# EAGLE board End_Spacer_B (EAGLE 9.5.2)
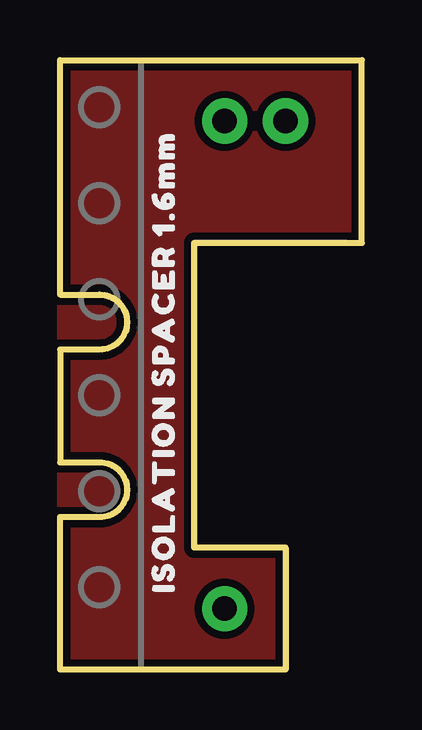
[diagram p0: board, top side]
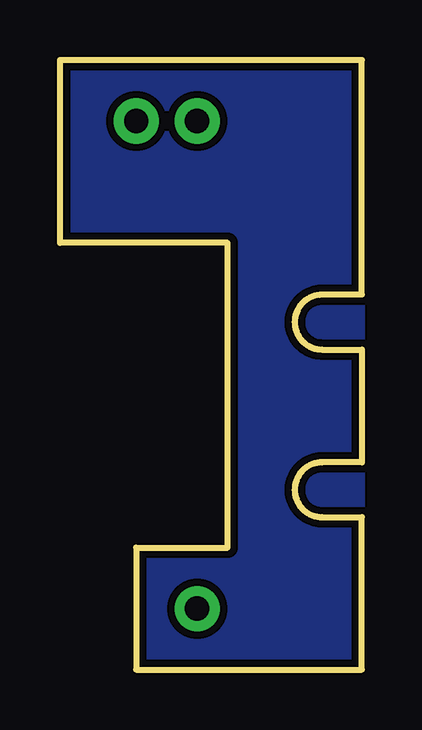
[diagram p1: board, bottom side, seen from below]

Size 12.57 x 25.4 mm. Coordinates in mm from the lower left corner, seen from the top.
Outline: 0,25.4 12.57,25.4 12.57,17.78 5.59,17.78 5.59,5.08 9.4,5.08 9.4,0 0,0 0,6.35 1.65,6.35 arc90 2.79,7.49 arc90 1.65,8.64 0,8.64 0,13.34 1.65,13.34 arc90 2.79,14.48 arc90 1.65,15.62 0,15.62 0,25.4
Copper layers (1*16): Top 0.035mm / dielectric 1.5mm / Bottom 0.035mm
Design rules "SparkFun-2-Layer-Minimum-JLCPCB": minimum track width 5mil, minimum drill 0.3mm, track to track 5mil, track to pad 5mil, pad to pad 5mil, via to via 5mil, smd to smd 5mil, copper to edge 7mil, drill to drill 7mil, minimum pad ring 5mil, minimum via ring 5mil, stop-mask expansion 4mil, vias tented up to drill 25mil, thermal gap 10mil

## Placement (x,y rotation side)
E$3  [ISOLATION_SPACER_1#6MM0]  4.32,2.54 90 top

## Library data of the parts
E$3 = output

## Tracks (layer width: path | path; a pad name or v marks a point on that pad's centre or on a via)
GND
  pour Top (isolate 0.305): 0,25.4 5.59,25.4 12.57,25.4 12.57,17.78 5.59,17.78 5.59,5.08 9.4,5.08 9.4,0 5.59,0 0,0
  pour Bottom (isolate 0.305): 0,25.4 0,0 5.59,0 9.4,0 9.4,5.08 5.59,5.08 5.59,17.78 12.57,17.78 12.57,25.4 5.59,25.4
N$41  (via drill 1.02 pad 1.88)
  other vias: 6.86,2.54
N$42  (via drill 1.02 pad 1.88)
  other vias: 9.4,22.86
N$47  (via drill 1.02 pad 1.88)
  other vias: 6.86,22.86